# Altium PCB Comms.PcbDoc
Units mm, origin at the board's own origin, x right, y up, seen from the top; angles counter-clockwise.
Board outline 59.25 x 48.75 mm, 4 copper layers (RF, GND, VDD_REG, Data), stack 0.651 mm thick; 52 components, 34 nets, 179 pads, 55 vias.
Unrouted connection lines stored in the file: 1.
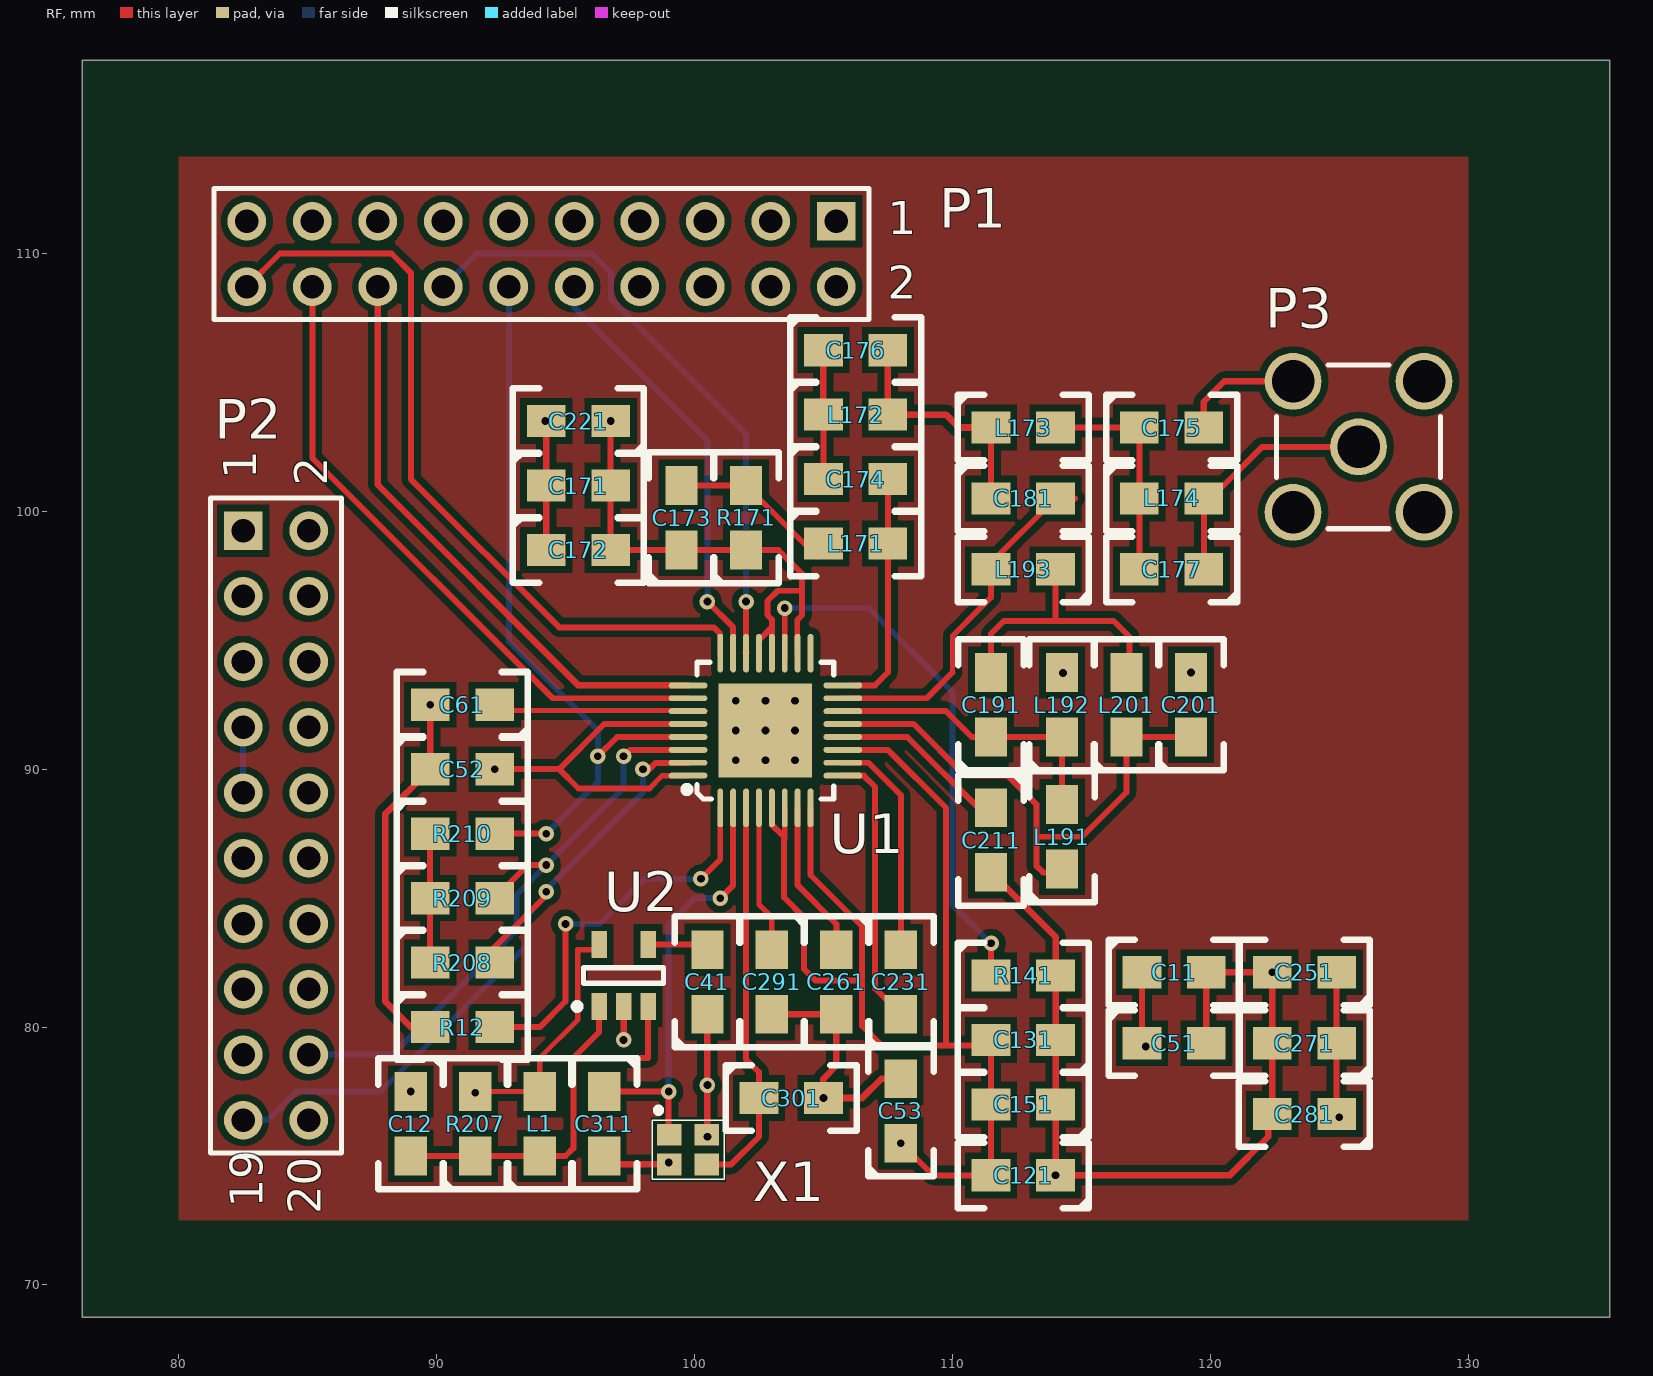
[diagram p0: RF view]
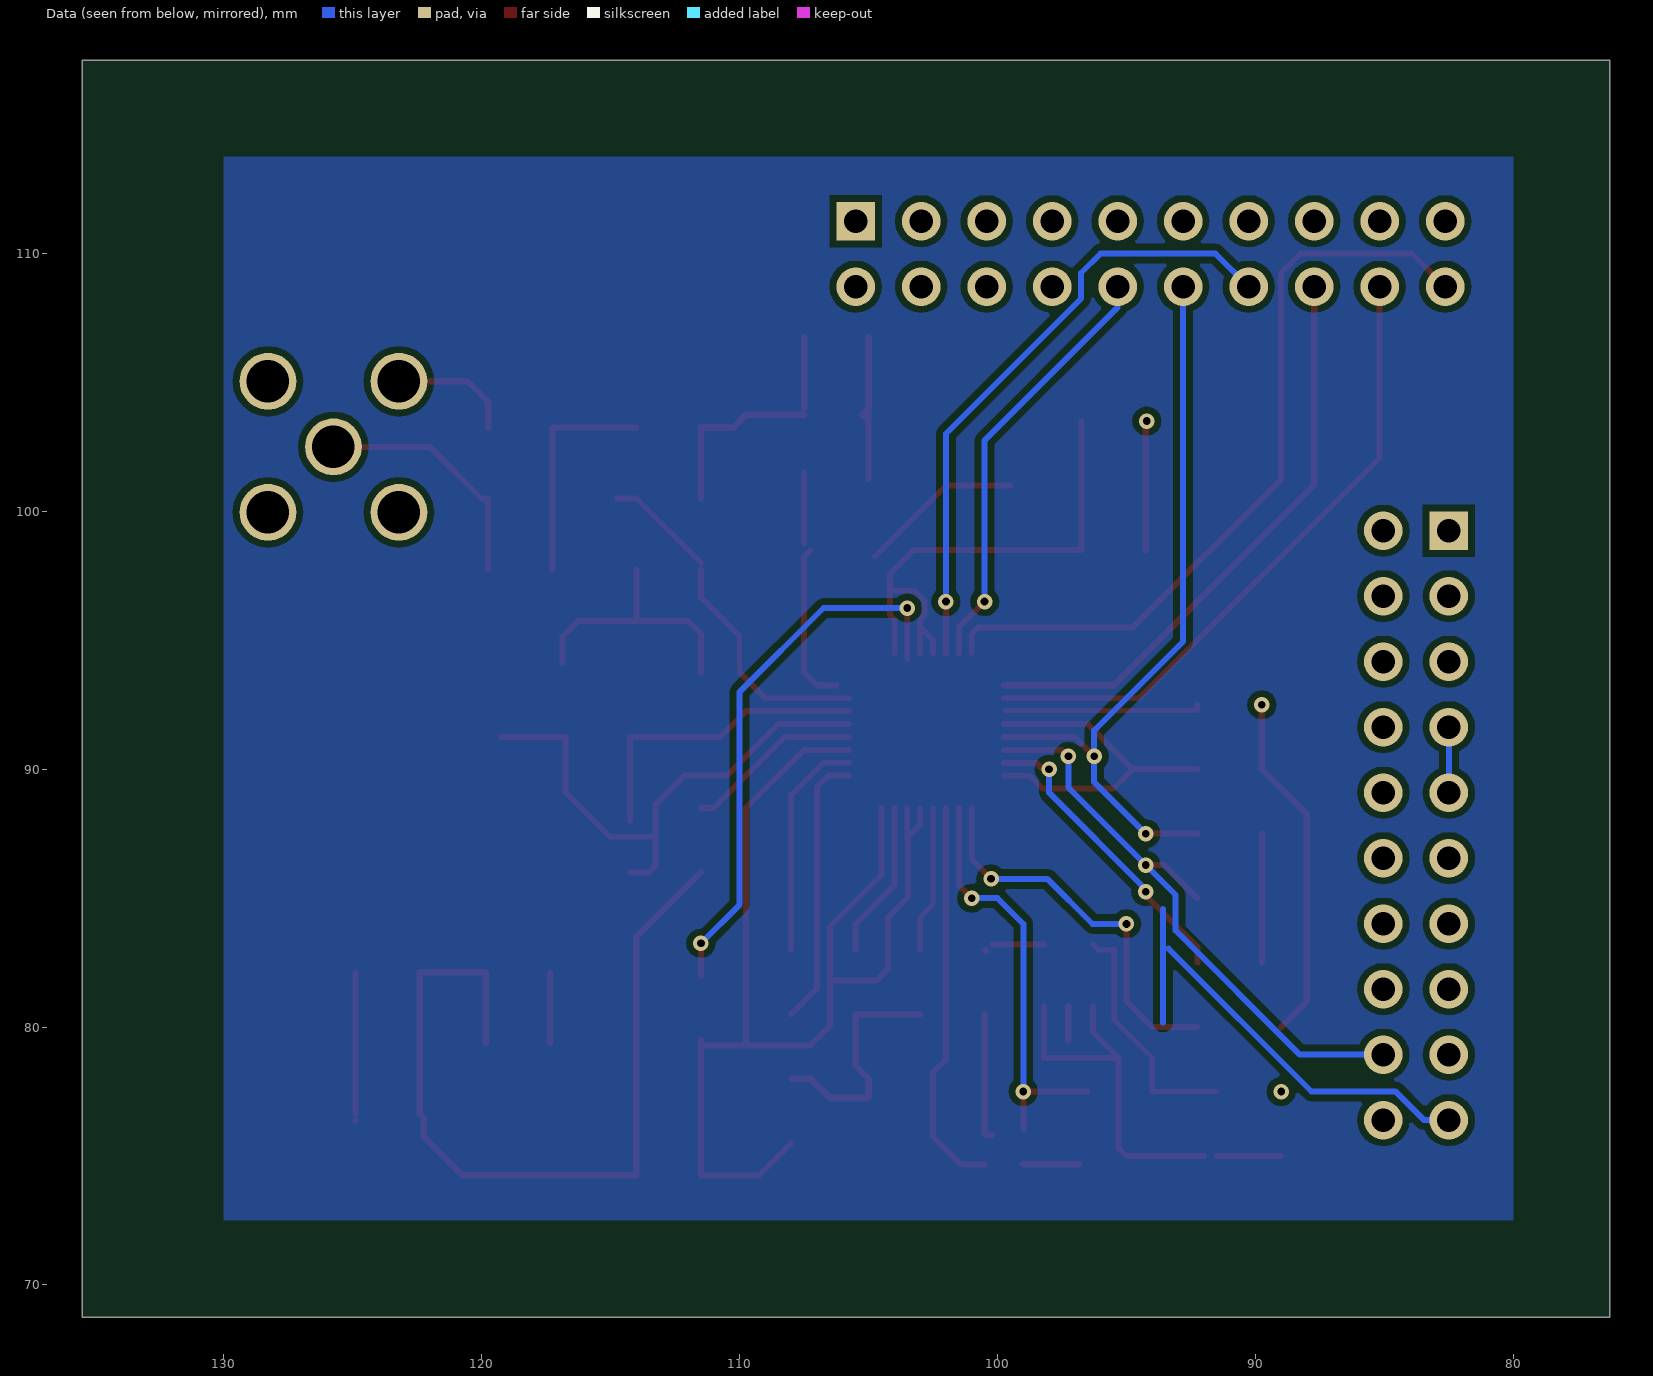
[diagram p1: Data view, seen from below]
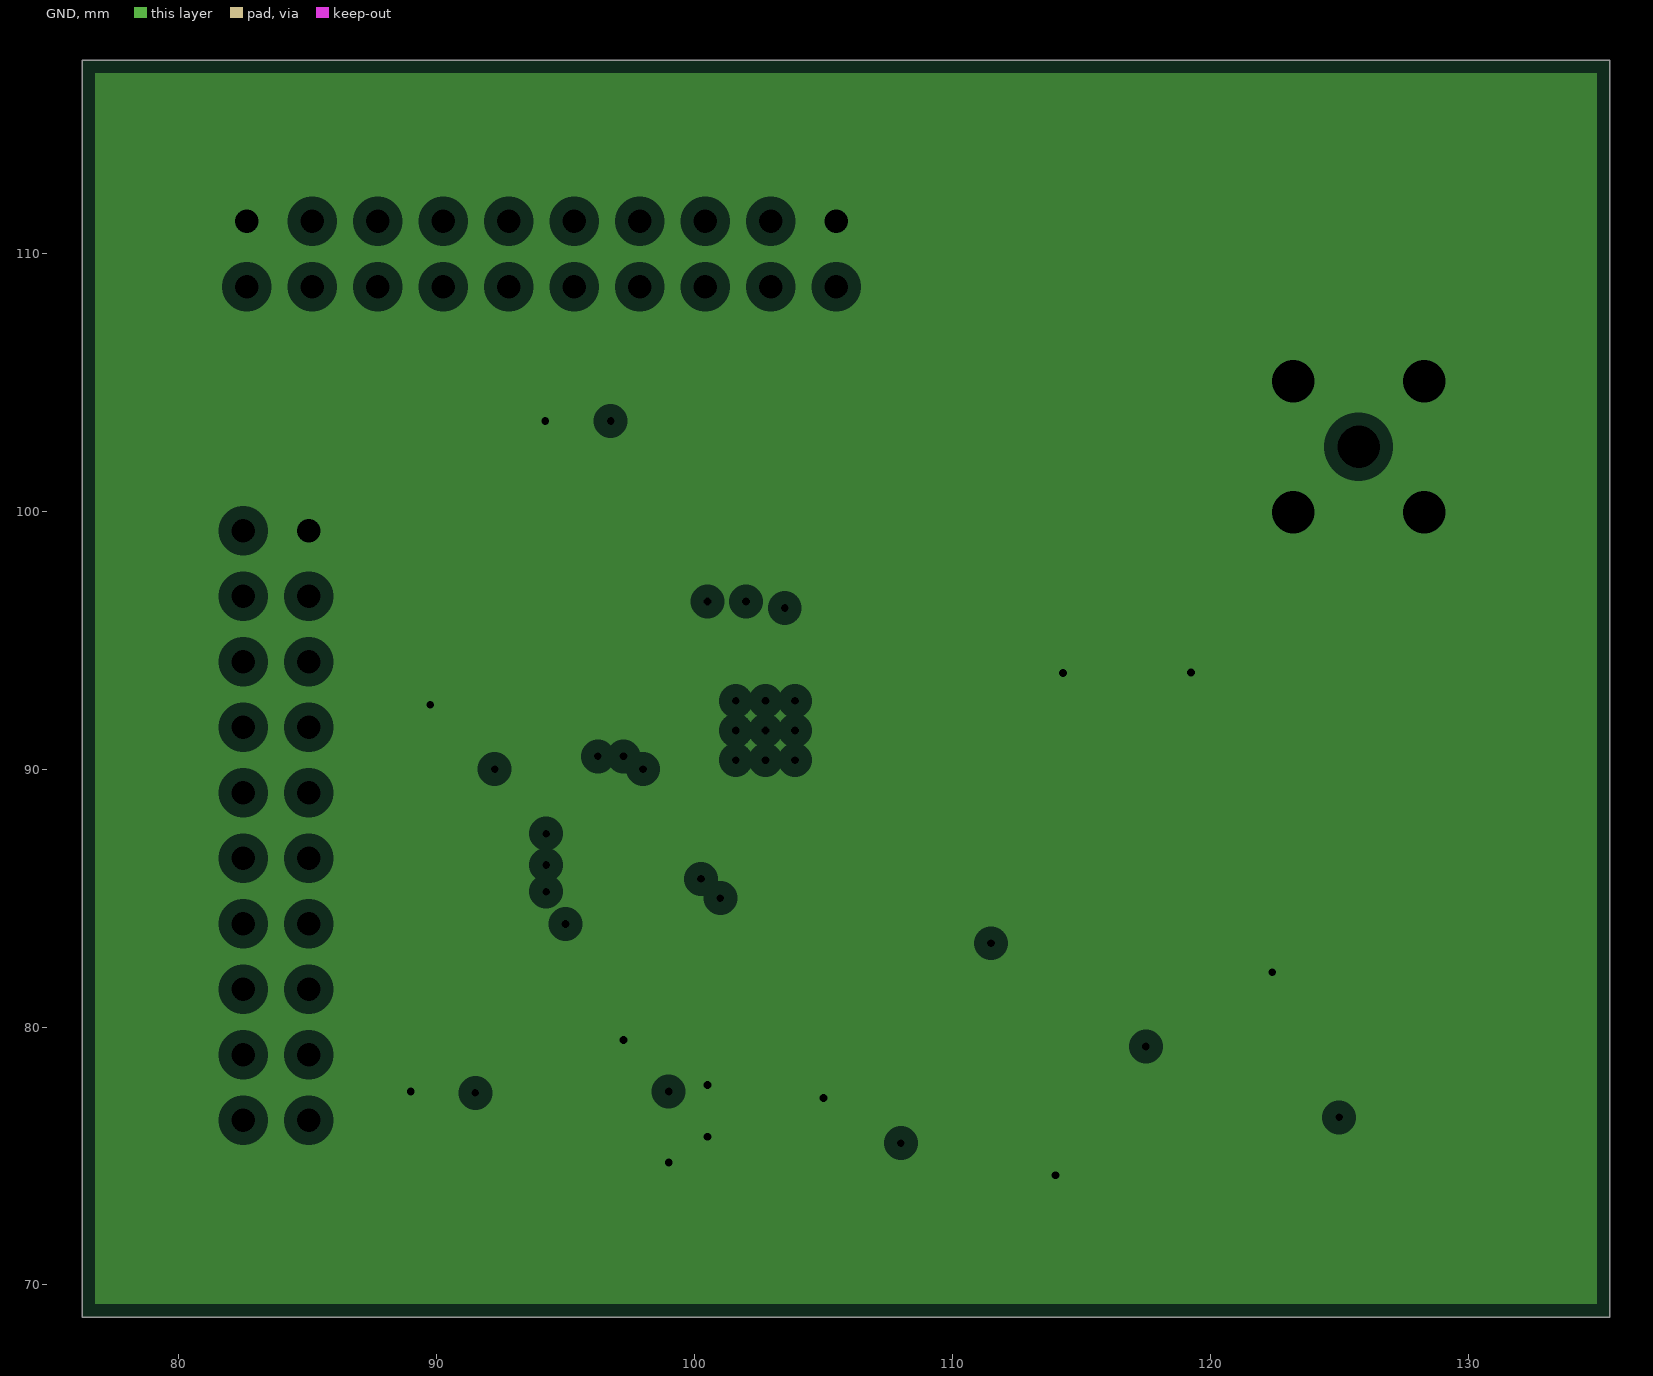
[diagram p2: GND, clearances drawn from the general rule]
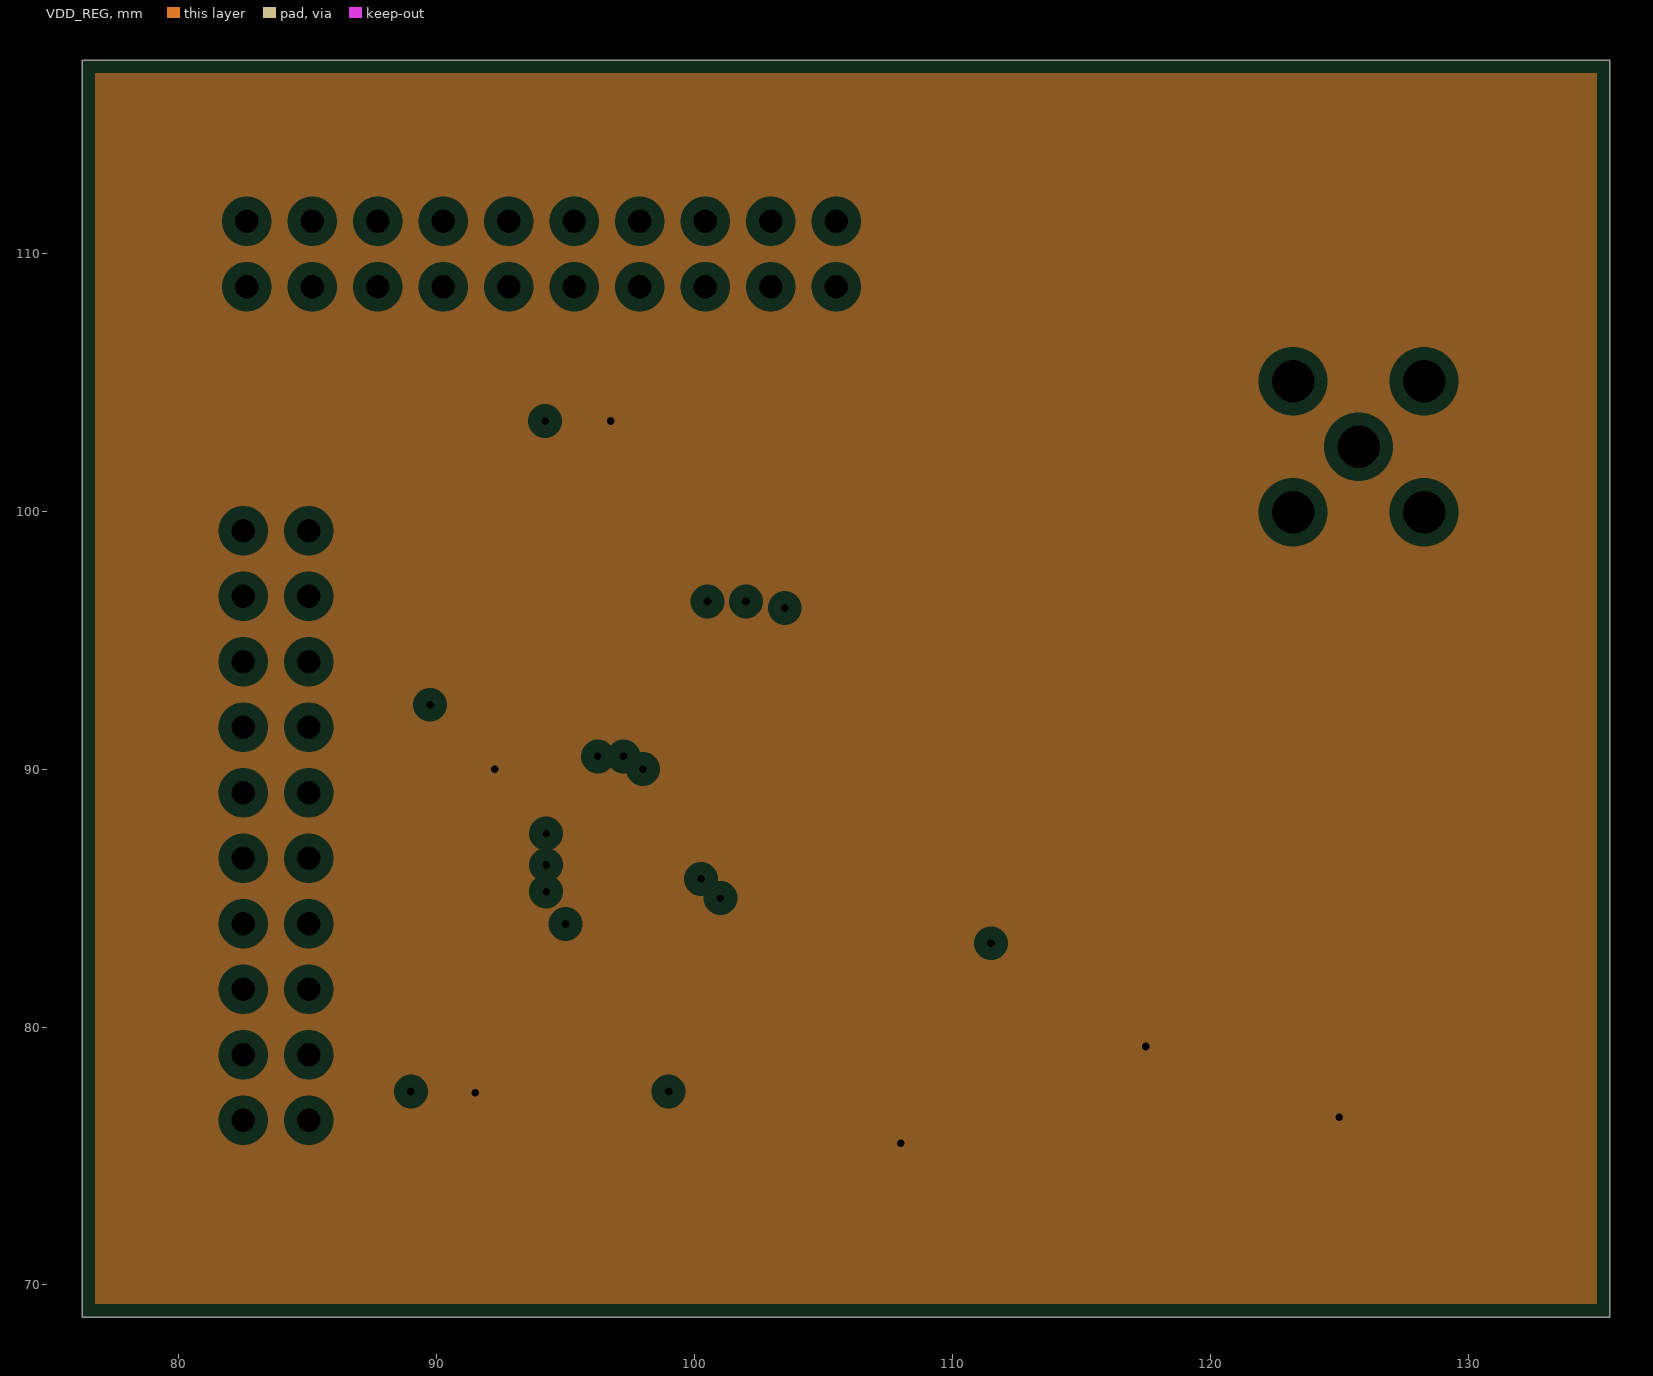
[diagram p3: VDD_REG, clearances drawn from the general rule]

## Layer stack, top to bottom
Top Solder: solder mask 0.0102, Solder Resist, Dk 3.5
RF: signal copper 0.0356
Dielectric 1: prepreg 0.127, FR-4, Dk 4.2
GND: plane copper 0.036, net GND
Dielectric 2: core 0.254, Dk 4.2
VDD_REG: plane copper 0.036, net VDD_REG
Dielectric 3: prepreg 0.127, Dk 4.2
Data: signal copper 0.0356
Bottom Solder: solder mask 0.0102, Solder Resist, Dk 3.5

## Board outline
76.25,117.5 76.25,68.75 135.5,68.75 135.5,117.5 76.25,117.5

## Design rules (kind name [scope] priority, off if disabled: settings)
Clearance [All] p1: gap=0.254
PlaneClearance [All] p1: clearance=0.508
PlaneConnect [All] p1: planeconnectstyle=Relief reliefexpansion=0.508 reliefentries=4 reliefconductorwidth=0.254 reliefairgap=0.254
PolygonConnect [All] p1: connectstyle=Relief reliefconductorwidth=0.254 reliefentries=4 polygonreliefangle="90 Angle" airgapwidth=0.254
RoutingVias [All] p1: holewidth=0.711 width=1.27 viastyle="Through Hole" minholewidth=0.29 minwidth=0.55 maxholewidth=0.711 maxwidth=1.27
SolderMaskExpansion [All] p1: expansion=0.102
UnpouredPolygon [All] p1: allowunpoured=FALSE
Width [All] p1: maxlimit=0.254 minlimit=0.18 preferedwidth=0.254 minimp=50.000000 maximp=50.000000 favimp=50.000000
27 further rules are at their usual default settings.

## Components (designator, comment, footprint, x,y, rotation, side; value= is the part's Value field where it differs from the comment)
C11 "0805 Cap" "0805 Cap" 118.6,82.125 r180 top
C12 "0805 Cap" "0805 Cap" 89,76.25 r90 top
C41 "0805 Cap" "0805 Cap" 100.5,81.75 r270 top
C51 "0805 Cap" "0805 Cap" 118.6,79.375 r180 top
C52 "0805 Cap" "0805 Cap" 91,90 r180 top
C53 "DNM" "0805 Cap" 108,76.75 r270 top
C61 "0805 Cap" "0805 Cap" 91,92.5 r0 top
C121 "0805 Cap" "0805 Cap" 112.75,74.25 r0 top
C131 "0805 Cap" "0805 Cap" 112.75,79.5 r0 top
C151 "0805 Cap" "0805 Cap" 112.75,77 r0 top
C171 "0805 Cap" "0805 Cap" 95.5,101 r180 top
C172 "DNM" "0805 Cap" 95.5,98.5 r180 top
C173 "DNM" "0805 Cap" 99.5,99.75 r270 top
C174 "0805 Cap" "0805 Cap" 106.25,101.25 r180 top
C175 "0805 Cap" "0805 Cap" 118.5,103.25 r180 top
C176 "0805 Cap" "0805 Cap" 106.25,106.25 r180 top
C177 "DNM" "0805 Cap" 118.5,97.75 r0 top
C181 "0805 Cap" "0805 Cap" 112.75,100.5 r180 top
C191 "0805 Cap" "0805 Cap" 111.5,92.5 r270 top
C201 "0805 Cap" "0805 Cap" 119.25,92.5 r270 top
C211 "0805 Cap" "0805 Cap" 111.5,87.25 r90 top
C221 "0805 Cap" "0805 Cap" 95.5,103.5 r0 top
C231 "0805 Cap" "0805 Cap" 108,81.75 r270 top
C251 "0805 Cap" "0805 Cap" 123.65,82.125 r0 top
C261 "0805 Cap" "0805 Cap" 105.5,81.75 r90 top
C271 "0805 Cap" "0805 Cap" 123.65,79.375 r0 top
C281 "0805 Cap" "0805 Cap" 123.65,76.625 r0 top
C291 "0805 Cap" "0805 Cap" 103,81.75 r90 top
C301 "0805 Cap" "0805 Cap" 103.75,77.25 r180 top
C311 "0805 Cap" "0805 Cap" 96.5,76.25 r90 top
L1 "" "0805 Resistor" 94,76.25 r270 top
L171 "Inductor" "0805 Resistor" 106.25,98.75 r180 top
L172 "Inductor" "0805 Resistor" 106.25,103.75 r180 top
L173 "Inductor" "0805 Resistor" 112.75,103.25 r180 top
L174 "Inductor" "0805 Resistor" 118.5,100.5 r180 top
L191 "Inductor" "0805 Resistor" 114.25,87.381 r270 top
L192 "Inductor" "0805 Resistor" 114.25,92.5 r270 top
L193 "Inductor" "0805 Resistor" 112.75,97.75 r0 top
L201 "Inductor" "0805 Resistor" 116.75,92.5 r270 top
P1 "Header 10X2" HDR2X10 105.5,111.25 r180 top
P2 "Header 10X2" HDR2X10 82.5,99.25 r270 top
P3 "32K101-400L5" ROS-32K101-400L5_V 125.75,102.5 r0 top
R12 "0805 Resistor" "0805 Resistor" 91,80 r180 top
R141 "0805 Resistor" "0805 Resistor" 112.75,82 r180 top
R171 "0805 Resistor" "0805 Resistor" 102,99.75 r270 top
R207 "0805 Resistor" "0805 Resistor" 91.5,76.25 r270 top
R208 "0805 Resistor" "0805 Resistor" 91,82.5 r180 top
R209 "0805 Resistor" "0805 Resistor" 91,85 r180 top
R210 "0805 Resistor" "0805 Resistor" 91,87.5 r180 top
U1 "CC1120" CC1120 102.75,91.5 r90 top
U2 "TPS79930DDCT" TI-DDC5_N 97.25,82 r90 top
X1 "FA-128 4-crystal Oscillator" FA-128 99.75,75.25 r0 top

## Footprints (in the part's own frame and the unit in brackets; to place one, negate y for a bottom-side part, rotate by r counter-clockwise, add the part's x,y. Pads: shape width x height; smd on the part's side, far side on the other; paste and mask are expansions set on the pad)
"0805 Cap" [mm]
  rect 1.5x1.25 smd: 1(1.25,0) 2(-1.25,0)
  silkscreen extent -2.54,-1.27 2.54,1.27, body extent -1,-0.63 1.1,0.63, height 0.9
"0805 Resistor" [mm] "0805 Resistor"
  rect 1.5x1.25 smd: 1(1.25,0) 2(-1.25,0)
  silkscreen extent -2.54,-1.27 2.54,1.27, body extent -1,-0.63 1.1,0.63, height 0.6
CC1120 [mm]
  rect 3.63x3.63 smd mask+0.07: 0(0,0)
  oval 0.23x1.5 smd mask+0.03: 1(-1.75,3) 2(-1.25,3) 3(-0.75,3) 4(-0.25,3) 5(0.25,3) 6(0.75,3) 7(1.25,3) 8(1.75,3) 17(1.75,-3) 18(1.25,-3) 19(0.75,-3) 20(0.25,-3) 21(-0.25,-3) 22(-0.75,-3) 23(-1.25,-3) 24(-1.75,-3)
  oval 1.5x0.23 smd mask+0.03: 9(3,1.75) 10(3,1.25) 11(3,0.75) 12(3,0.25) 13(3,-0.25) 14(3,-0.75) 15(3,-1.25) 16(3,-1.75) 25(-3,-1.75) 26(-3,-1.25) 27(-3,-0.75) 28(-3,-0.25) 29(-3,0.25) 30(-3,0.75) 31(-3,1.25) 32(-3,1.75)
  silkscreen extent -2.65,-2.65 2.65,3.17
FA-128 [mm] "Crystal Oscillator, 32 MHz, 10 PPM, 10 PF"
  rect 0.95x0.85 smd mask+0.07: 1(-0.725,0.575) 2(0.725,0.575) 3(0.725,-0.575) 4(-0.725,-0.575)
  silkscreen extent -1.4,-1.14 1.4,1.54
HDR2X10 [mm] "Connector; Header; 10x2 Position"
  rect 1.5x1.5 hole 0.9: 1(0,0)
  round 1.5 hole 0.9: 2(0,2.54) 3(2.54,0) 4(2.54,2.54) 5(5.08,0) 6(5.08,2.54) 7(7.62,0) 8(7.62,2.54) 9(10.16,0) 10(10.16,2.54) 11(12.7,0) 12(12.7,2.54) 13(15.24,0) 14(15.24,2.54) 15(17.78,0) 16(17.78,2.54) 17(20.32,0) 18(20.32,2.54) 19(22.86,0) 20(22.86,2.54)
  silkscreen extent -1.27,-1.27 24.13,3.81
ROS-32K101-400L5_V [mm] "SMA Straight Jack, 6.35x6.35x9.5mm, Rosenberger Recommended"
  round 2.2 hole 1.65: 1(0,0) MH(-2.54,-2.54) MH(-2.54,2.54) MH(2.54,-2.54) MH(2.54,2.54)
  silkscreen extent -3.17,-3.18 3.18,3.17, body extent -3.17,-3.17 3.18,3.18, height 9.5
TI-DDC5_N [mm] "SOT23, 5-Leads, Body 2.9x1.6mm, Pitch 0.95mm, IPC Medium Density"
  rect 1.05x0.6 smd: 1(-1.2,0.95) 2(-1.2,0) 3(-1.2,-0.95) 4(1.2,-0.95) 5(1.2,0.95)
  silkscreen extent -1.32,-1.55 0.3,1.92, body extent -0.87,-1.52 0.87,1.53, height 1.1

## Part data
C11 C51 C53 C61 C121 C131 C151 C177 C211 C221 C251 C261 C271 C281 C291: library part "0805 MLCC - X7R, 10%", "0805 MLCC - X7R, 10%"
C12 C41 C52 C171 C172 C173 C174 C175 C176 C181 C191 C201 C301 C311: library part "0805 MLCC - NP0, 5%", "0805 MLCC - NP0, 5%"
C231: library part "0805 MLCC - NP0, 5%", "0805 MLCC - U2J, 5%"
L1: library part Inductor, "digikey: 490-1041-1-ND"
P1 P2: "Header, 10-Pin, Dual row"
P3: "SMA Straight Jack, Up to 18 GHz, -55 to 155 degC"
R12 R141 R171 R207 R208 R209 R210: library part "0805 Thick Film Resistor 1%", "0805 Thick Film Resistor 1%"
U1: "Digi-Key Part Number 296-35667-1-ND"
U2: "Digi-Key Part Number 296-17782-1-ND"
X1: library part "4-Pin Oscillator"

## Via types
v1: diameter 0.6, hole 0.3, RF to Data, 17 vias
v2: diameter 0.6, hole 0.3, RF to GND, 9 vias
v3: diameter 0.7, hole 0.3, RF to GND, 9 vias
v4: diameter 1.27, hole 0.712, RF to GND, 7 vias
v5: diameter 1.27, hole 0.712, RF to Data, 6 vias
v6: diameter 0.6, hole 0.3, RF to VDD_REG, 6 vias
v7: diameter 1.2, hole 0.712, RF to Data, 1 vias

## Nets (pads, with @x,y where several pads share a name; then routed paths per layer and width w, separated by ;. In a path a pad name is that pad's centre, name@x,y a point inside that pad or via, vN(x,y) a via of type N, cw(c..) or ccw(c..) an arc to the next point about the centre after c; other vN are vias at no path point)
3V3A: C12.2 L1.1 R207.1 U2.1 U2.3 | length 16.7
  RF w0.23: C12.2 R207.1 ; R207.1@92,75 L1.1 95,75 95.3,75.3 95.3,78.8 ; U2.1 96.3,79.8 95.3,78.8 ; U2.3 98.2,78.8 95.3,78.8
+3V3A: P2.7 P2.9 | length 2.5
  Data w0.23: v5(82.5,89.09) v7(82.5,91.63)
CSN: P1.14 U1.11 | length 24.3
  RF w0.23: U1.11@101.984,94.5 U1.11 ; v1(102,96.5) U1.11@102,94.516 ; U1.11@102.016,94.516 U1.11@102,94.516 ; U1.11 101.984,94.516 U1.11@102,94.516 ; U1.11 U1.11@102,94.516
  Data w0.23: v5(90.26,108.71) 91.55,110 96,110 96.761,109.239 96.761,108.246 102,103.007 v1(102,96.5)
GND: C11.2 C12.1 C41.1 C51.2 C52.1 C53.2 C61.2 C121.1 C131.1 C151.1 C171.1 C172.1 C175.2 C201.2 C211.2 C221.2 C251.2 C261.2 C271.2 C281.2 C291.2 C301.2 C311.2 L192.2 P1.1 P1.19 P2.2 P3.MH R12.1 R141.2 U2.2 X1.2 X1.4 | length 74.3
  RF w0.254: 89,80 88,81 88,88.25 C52.1 v1(89.75,92.5) ; v1(94.209,103.5) C221.2 C171.1 C172.1 ; C311.2@96.825,74.675 X1.4 ; v2(97.25,79.5) U2.2 ; X1.2@100.225,75.825 X1.2 ; X1.2@100.5,75.85 C41.1 ; C291.2 C261.2 105.5,78.5 105,78 v2(105,77.25) 106.5,77.25 107.25,78 C53.2 ; C211.2 114,83.5 R141.2 C131.1 C151.1 v2(114,74.25) 120.75,74.25 122.25,75.75 C281.2@122.25,76.475 ; C175.2 119.75,104.246 120.544,105.04 v4(123.21,105.04) ; C51.2 C11.2 v2(122.4,82.125) C271.2 C281.2
  other v1: 89,77.5
  other v2: 99,74.75 100.5,75.75 100.5,77.75 114.29,93.734 119.25,93.75
  other v4: 85.04,99.25 123.21,99.96 128.29,99.96 128.29,105.04 82.64,111.25 105.5,111.25
GPIO0: P1.10 U1.10 | length 16.8
  RF w0.23: v1(100.5,96.5) 101.5,95.5 U1.10
  Data w0.23: v5(95.34,108.71) 95.34,107.91 100.5,102.75 v1(100.5,96.5)
GPIO2: P1.12 R210.2 U1.4 | length 29.3
  RF w0.23: R210.2 v1(94.25,87.5) ; v1(96.25,90.5) 97,91.25 U1.4
  Data w0.23: v5(92.8,108.71) 92.8,94.95 96.25,91.5 v1(96.25,90.5) 96.25,89.5 v1(94.25,87.5)
GPIO3: P2.18 R209.2 U1.3 | length 23.5
  RF w0.23: R209.2 93.532,86.282 v1(94.25,86.282) ; 97.5,90.75 U1.3
  Data w0.23: P2.18@85.139,78.831 v5(85.04,78.93) 88.277,78.93 93.097,83.75 93.097,85.129 v1(94.25,86.282) ; v1@94.25,86.218 v1(94.25,86.282) ; v1(97.25,90.5) 97.25,89.282 v1(94.25,86.282)
MISO: P1.20 U1.9 | length 30.4
  RF w0.23: P1.20 83.93,110 88.25,110 89,109.25 89,101.25 94.75,95.5 100.75,95.5 101,95.25 U1.9
MOSI: P1.18 U1.7 | length 25.1
  RF w0.23: P1.18 85.18,102.07 94.5,92.75 U1.7
NetC41_2: C41.2 U2.4 | length 2.1
  RF w0.23: U2.4 C41.2@100.2,83.2 ; C41.2@100.45,82.95 C41.2
NetC61_1: C61.1 U1.6 | length 7.7
  RF w0.203: C61.1 92.25,92.279 U1.6@99.721,92.279
NetC173_2: C173.2 L171.1 R171.2 | length 6.4
  RF w0.23: C173.2 R171.2 L171.1@104.75,98.25
NetC174_1: C174.1 C176.1 L172.1 | length 6.2
  RF w0.23: C174.1 L172.1@105,103.5 ; L172.1@105,103.5 105.25,103.75 105,104 L172.1@105,103.5
  RF w0.254: L172.1@105,104 C176.1@105,106.75
NetC174_2: C174.2 L171.2 U1.17 | length 9.1
  RF w0.23: U1.17@106.25,93.25 107,93.25 107.5,93.75 107.5,98.25 L171.2@107.25,98.5 ; L171.2 C174.2@107.5,101.5
NetC175_1: C175.1 C177.2 L173.2 L174.1 | length 8.7
  RF w0.23: L173.2 C175.1 L174.1 C177.2
NetC176_2: C176.2 C181.1 L172.2 L173.1 | length 9.7
  RF w0.23: C181.1 L173.1
  RF w0.254: L172.2 109.75,103.75 110.25,103.25 L173.1 ; L172.2@107.5,104 C176.2 C176.2@107.5,106.75
NetC177_1: C177.1 L174.2 P3.1 | length 9.6
  RF w0.23: C177.1 L174.2 120.01,100.5 122.01,102.5 P3.1
NetC181_2: C181.2 L193.2 U1.18 | length 13.6
  RF w0.2: 110,93.75 110,95.164 110.586,95.75
  RF w0.23: U1.18 109,92.75 110,93.75 ; 110.586,95.75 111.5,96.664 L193.2 ; L193.2@111.5,98 C181.2 114.75,100.5
NetC191_1: C191.1 L191.2 L192.1 U1.19 | length 12.2
  RF w0.23: U1.19 109.75,92.25 110.75,91.25 C191.1 L192.1 L191.2@114.25,88
NetC191_2: C191.2 L193.1 L201.2 | length 10.3
  RF w0.23: C191.2 111.5,95.25 112,95.75 114,95.75 ; L193.1 114,95.75 ; L201.2@116.875,94.125 116.875,95.125 116.25,95.75 114,95.75
NetC201_1: C201.1 L191.1 L201.1 U1.20 | length 21.1
  RF w0.23: U1.20 108.5,91.75 110.5,89.75 112.147,89.75 113.256,88.641 113.256,86.256 113.512,86 L191.1@114.25,86 ; 113.256,87.381 115.028,87.381 116.75,89.103 L201.1 C201.1
NetC211_1: C211.1 U1.21 | length 6.9
  RF w0.23: U1.21 108.25,91.25 111,88.5 C211.1
NetC231_1: C231.1 U1.24 | length 10.7
  RF w0.23: U1.24 106.566,89.75 107,89.316 107,81.5 C231.1
NetC231_2: C231.2 U1.23 | length 8.8
  RF w0.23: U1.23 106.75,90.25 108,89 C231.2
NetC261_1: C261.1 U1.26 | length 6.1
  RF w0.23: U1.26 104,85.5 105.5,84 C261.1
NetC291_1: C291.1 U1.29 | length 5.7
  RF w0.203: U1.29 102.5,84.75 103,84.25 C291.1
NetC301_1: C301.1 U1.30 X1.3 | length 15.4
  RF w0.23: X1.3 101.425,74.675 102.5,75.75 C301.1 102.5,78.25 102,78.75 U1.30
NetC311_1: C311.1 U1.31 X1.1 | length 16.3
  RF w0.23: C311.1 v1(99,77.5) X1.1@99,76.05 ; v1(101,85) 101.5,85.5 U1.31
  Data w0.23: v1@99,77.75 99,84 100,85 v1(101,85)
NetR12_2: R12.2 U1.32 | length 15.2
  RF w0.23: R12.2 94,80 95,81 v1(95,84) ; v1(100.25,85.75) 101,86.5 U1.32
  Data w0.23: v1(95,84) 96.316,84 98.066,85.75 v1(100.25,85.75)
NetR141_1: R141.1 U1.14 | length 21.5
  RF w0.23: U1.14@103.5,94.25 v1(103.5,96.25) ; R141.1 v1(111.5,83.25)
  Data w0.23: v1(103.5,96.25) 106.75,96.25 110,93 110,84.75 v1(111.5,83.25)
RESET_N: P2.19 R208.2 U1.2 | length 30.2
  RF w0.23: R208.2 92.25,83.103 94.25,85.103 v1(94.25,85.25) ; v1(98,90) 98.25,90 98.484,90.234 99.75,90.234 U1.2
  Data w0.23: v5(82.5,76.39) P2.19@82.86,76.39 ; 93.369,83.043 87.825,77.5 85.513,77.5 85.504,77.509 84.576,77.509 83.457,76.39 P2.19@83.14,76.39 ; 93.581,80.169 93.581,84.581 ; v1(94.25,85.25) 94.25,85.336 98,89.086 v1(98,90) ; P2.19@82.86,76.39 83,76.25 P2.19@83.14,76.39 ; P2.19@82.86,76.39 P2.19@83.14,76.39
SCLK: P1.16 U1.8 | length 22.9
  RF w0.254: P1.16 87.72,101.03 95.5,93.25 U1.8
VDD_REF: R208.1 R209.1 R210.1 | length 5
  RF w0.23: R208.1 R209.1 R210.1
VDD_REG: C11.1 C51.1 C52.2 C53.1 C121.2 C131.2 C151.2 C171.2 C172.2 C173.1 C221.1 C251.1 C271.1 C281.1 L1.2 R171.1 R207.2 U1.1 U1.5 U1.12 U1.13 U1.15 U1.22 U1.25 U1.27 U1.28 U2.5 | length 100.7
  RF w0.203: R207.2 L1.2 94,78.809 95.471,80.279 95.471,83 96.1,83 U2.5 ; 98.25,89.25 98.75,89.75 U1.1 ; U1.28@103,87.846 U1.28 ; 103.471,87.375 103.471,87.279 103.5,87.309
  RF w0.23: v6(92.25,90) 94.75,90 ; v6(96.75,103.5) C171.2 C172.2 C173.1 R171.1 103.25,98.5 104.169,97.581 104.169,97 ; 98.25,89.25 95.5,89.25 94.75,90 ; U1.5 96.5,91.75 94.75,90 ; U1.12 102.5,95 103,95.5 ; U1.28@103,87.846 103.471,87.375 ; U1.13 103,95.5 ; 103.471,87.279 103.471,85.029 104.24,84.26 104.24,82.26 104.7,81.8 106.444,81.8 ; 103.5,87.309 U1.27 ; U1.15 103.984,94.516 103.984,95.788 104.169,95.973 104.169,97 ; U1.25 104.5,85.897 106.494,83.903 106.494,80.046 107.25,79.29 109.75,79.29 ; U1.22 107.5,90.75 109.75,88.5 109.75,79.29 ; v6(108,75.5) 109.25,74.25 C121.2 C151.2 C131.2 ; C131.2@111.46,79.29 109.75,79.29 ; C51.1 C11.1 ; C281.1 C271.1 C251.1 ; 103,95.5 103,95.804 102.831,95.973 102.831,96.527 103.223,96.919 104.088,96.919 104.169,97
  other v6: 125,76.5 91.5,77.45 117.5,79.25
pads on no net: P1.2 P1.3 P1.4 P1.5 P1.6 P1.7 P1.8 P1.9 P1.11 P1.13 P1.15 P1.17 P2.1 P2.3 P2.4 P2.5 P2.6 P2.8 P2.10 P2.11 P2.12 P2.13 P2.14 P2.15 P2.16 P2.17 P2.20 U1.0 U1.16
copper on no net:
  other v3: 101.6,90.35 102.75,90.35 103.9,90.35 101.6,91.5 102.75,91.5 103.9,91.5 101.6,92.65 102.75,92.65 103.9,92.65

## Polygon pours and split planes (outlines as drawn)
no net on Data "bottom" (solid, pour order 13): 80,113.75 80,72.5 130,72.5 130,113.75 80,113.75
no net on RF "bottom" (solid, pour order 15): 80,113.75 80,72.5 130,72.5 130,113.75 80,113.75
GND on GND (split plane): 134.99,69.26 76.76,69.26 76.76,116.99 134.99,116.99
VDD_REG on VDD_REG (split plane): 134.99,69.26 76.76,69.26 76.76,116.99 134.99,116.99

## Text inside footprints (layer, text, board x,y; h text height)
P1: Top Overlay "1" at 107.5,110.75 h1.27; Top Overlay "2" at 107.5,108.25 h1.27
P2: Top Overlay "1" at 83,101.25 h1.27 r90; Top Overlay "2" at 85.75,101 h1.27 r90; Top Overlay "19" at 83.25,73 h1.27 r90; Top Overlay "20" at 85.5,72.75 h1.27 r90